# Altium PCB main.PcbDoc
Units mm, origin at the board's own origin, x right, y up, seen from the top; angles counter-clockwise.
Board outline 152.4 x 101.6 mm, 2 copper layers (Top Layer, Bottom Layer); 98 components, 61 nets, 347 pads, 75 vias.
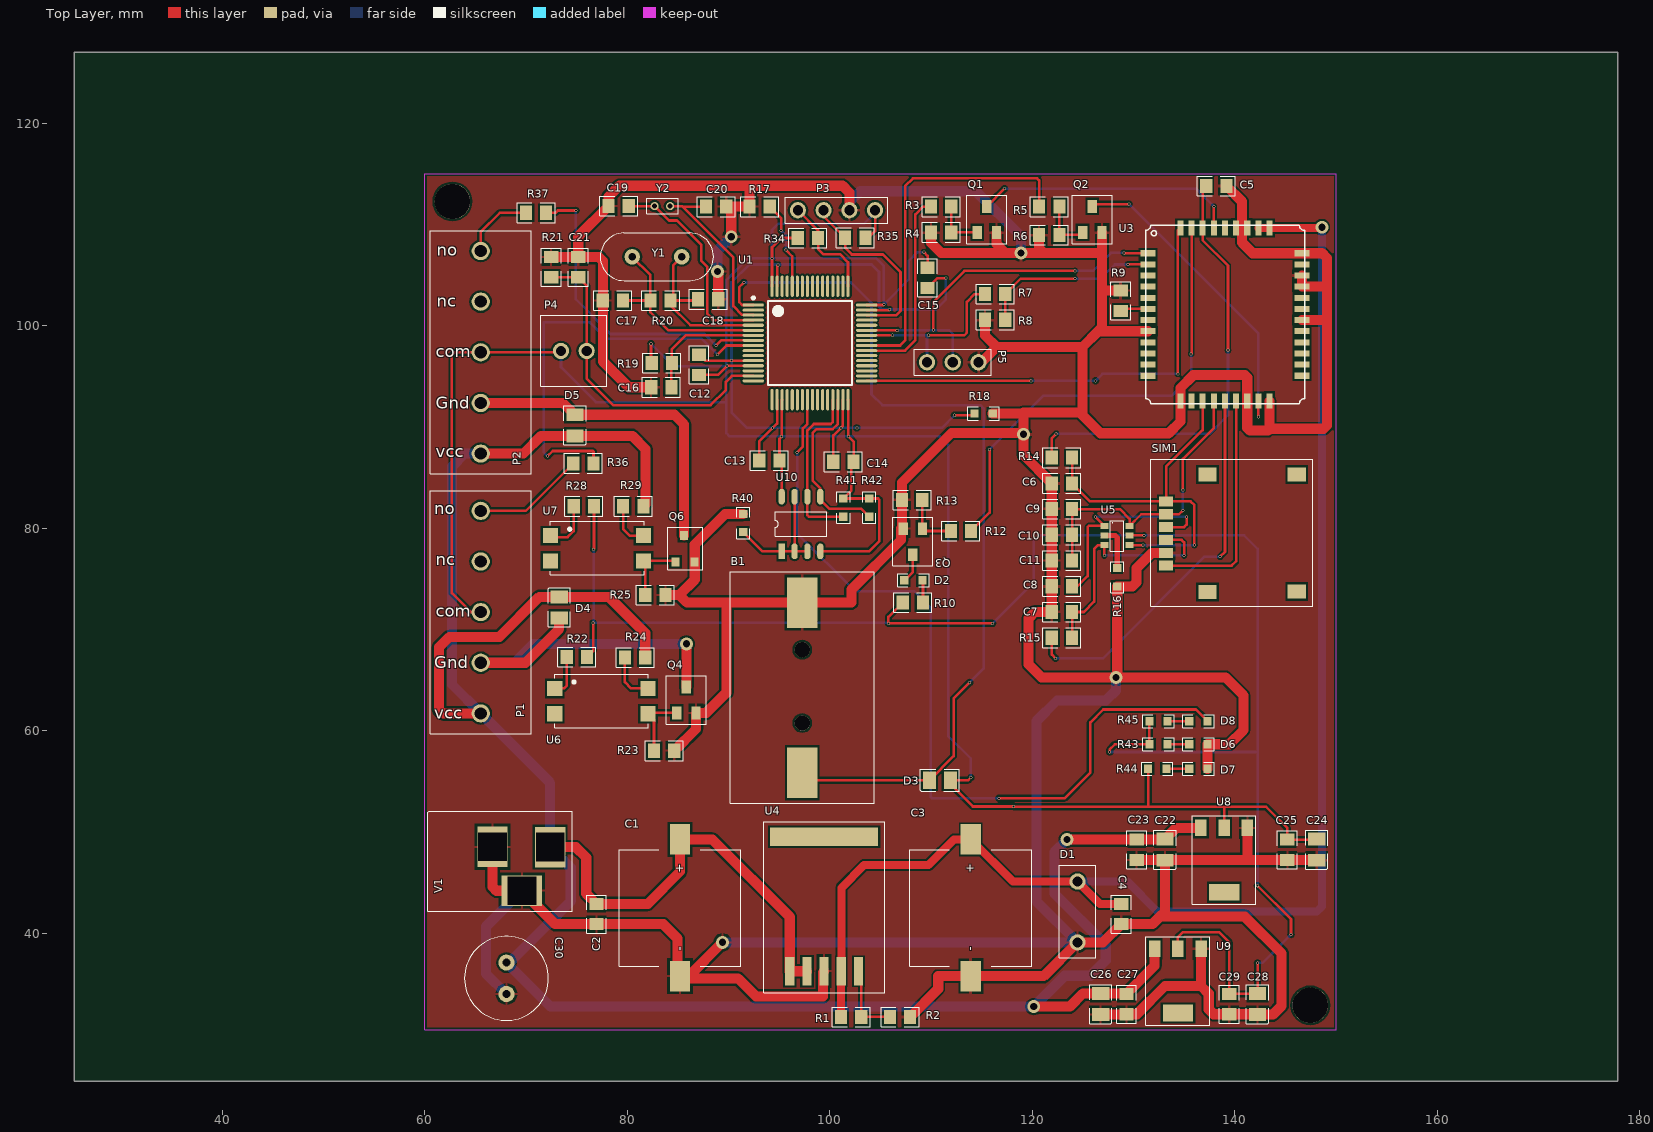
[diagram p0: Top Layer view]
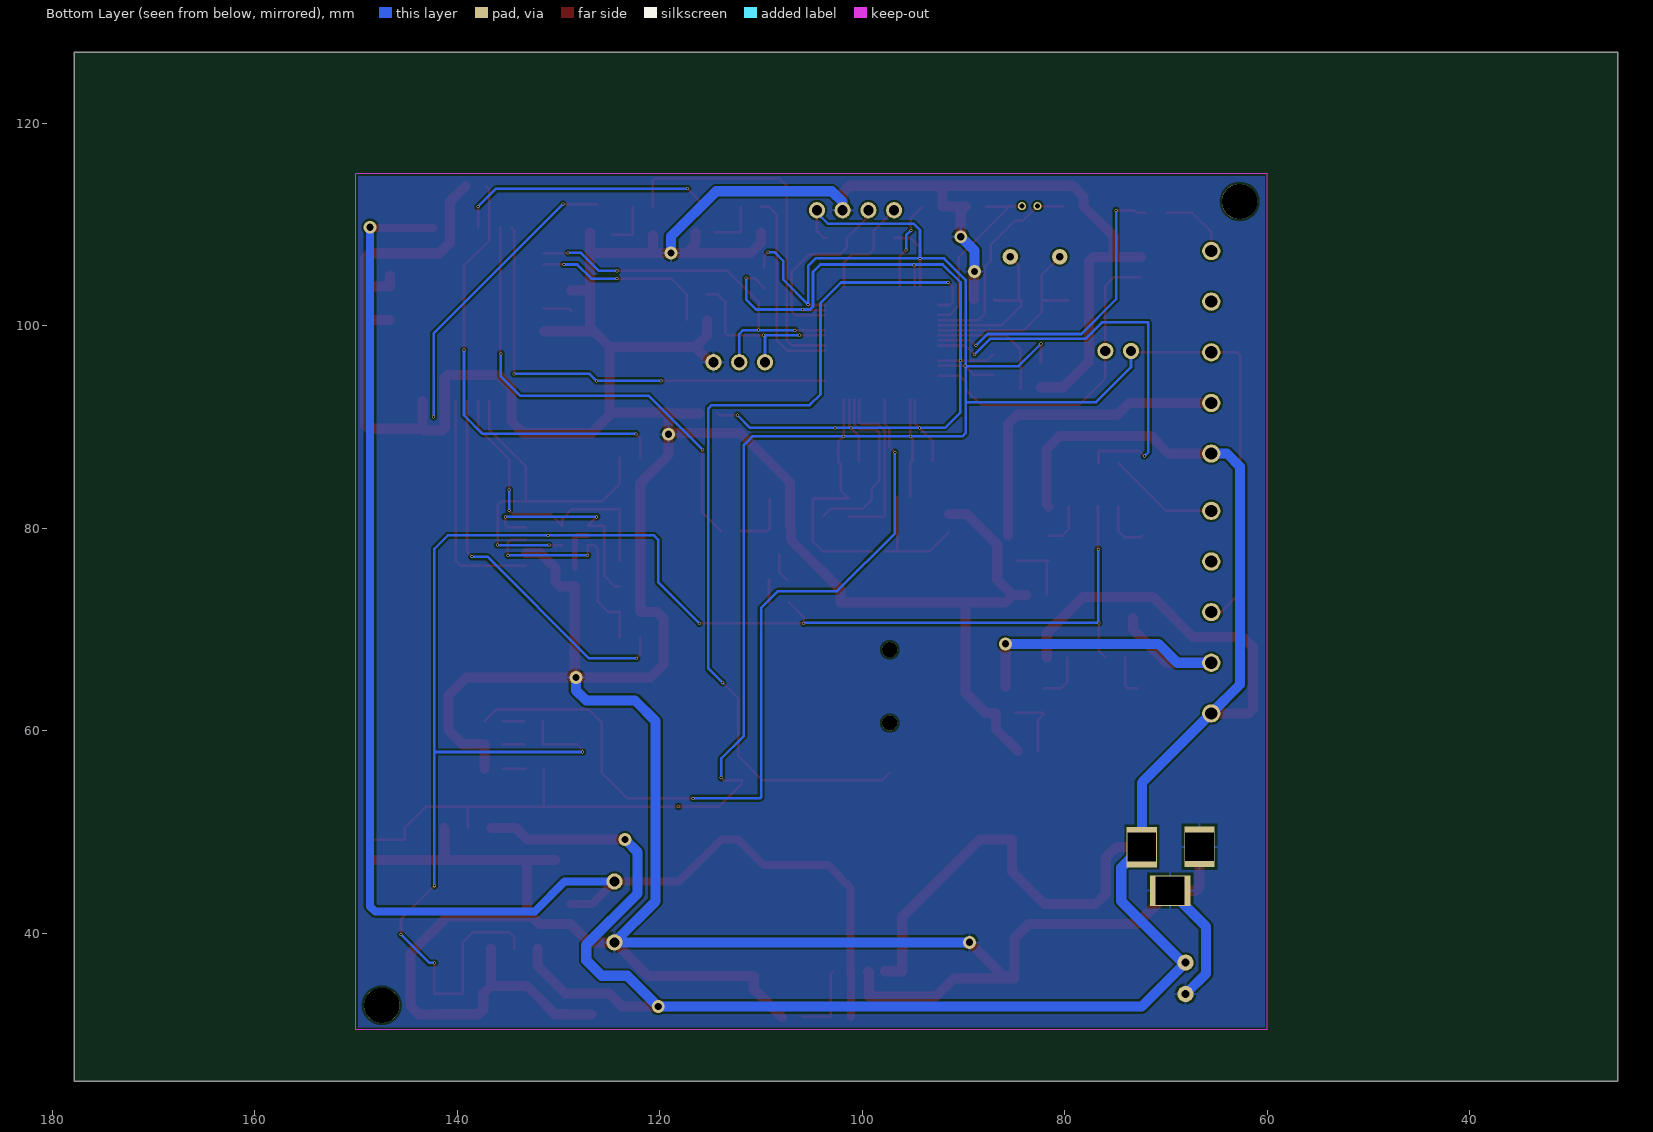
[diagram p1: Bottom Layer view, seen from below]

## Layer stack, top to bottom
Top Solder: solder mask 0.0102, Solder Resist, Dk 3.5
Top Layer: signal copper 0.0356
Dielectric 1: dielectric 0.32, FR-4, Dk 4.8
Bottom Layer: signal copper 0.0356
Bottom Solder: solder mask 0.0102, Solder Resist, Dk 3.5

## Board outline
25.4,25.4 177.8,25.4 177.8,127 25.4,127

## Design rules (kind name [scope] priority, off if disabled: settings)
Clearance [All] p1: gap=0.2
PolygonConnect [All] p1: connectstyle=Relief reliefconductorwidth=0.254 reliefentries=4 polygonreliefangle="90 Angle" airgapwidth=0.254
RoutingVias [All] p1: holewidth=0.711 width=1.27 viastyle="Through Hole" minholewidth=0.711 minwidth=1.27 maxholewidth=0.711 maxwidth=1.27
SolderMaskExpansion [All] p1: expansion=0.102
Width NetD4_1 [InNet('NetD4_1')] p1: maxlimit=1 minlimit=1 preferedwidth=1
Width NetD5_1 [InNet('NetD5_1')] p2: maxlimit=1 minlimit=1 preferedwidth=1
Width NetR16_2 [InNet('NetR16_2')] p3: maxlimit=0.5 minlimit=0.5 preferedwidth=0.5
Width VCC12 [InNet('VCC12V')] p4: maxlimit=1 minlimit=1 preferedwidth=1
Width VCC4.16 [InNet('VCC4.16')] p5: maxlimit=0.8 minlimit=0.8 preferedwidth=0.8
Width Gnd [InNet('GND')] p6: maxlimit=1 minlimit=1 preferedwidth=1
Width [All] p7: maxlimit=0.254 minlimit=0.254 preferedwidth=0.254
30 further rules are at their usual default settings.

## Components (designator, comment, footprint, x,y, rotation, side; value= is the part's Value field where it differs from the comment)
B1 "CR1220" CR1220 97.282,64.262 r90 top
C1 "470uF" 10MMX10MM+ 85.217,49.276 r270 top
C2 "100nF" 0805 76.962,41.91 r90 top
C3 "470uF" 10MMX10MM+ 113.919,49.276 r270 top
C4 "100nF" 0805 128.778,41.91 r270 top
C5 "1uF" 0805 138.176,113.792 r0 top
C6 "33pF" 0805 122.92,84.435 r0 top
C7 "33pF" 0805 122.92,71.735 r0 top
C8 "33pF" 0805 122.92,74.275 r0 top
C9 "33pF" 0805 122.92,81.895 r0 top
C10 "1uF" 0805 122.92,79.355 r0 top
C11 "100pF" 0805 122.92,76.815 r0 top
C12 "0.1uF" 0805 87.097,96.139 r90 top
C13 "0.1uF" 0805 94.031,86.69 r180 top
C14 "0.1uF" 0805 101.346,86.563 r180 top
C15 "0.1uF" 0805 109.652,104.724 r270 top
C16 "0.1uF" 0805 83.363,93.929 r180 top
C17 "20pF" 0805 78.588,102.489 r0 top
C18 "20pF" 0805 87.986,102.616 r180 top
C19 "12pF" 0805 79.146,111.811 r0 top
C20 "12pF" 0805 88.773,111.76 r180 top
C21 "0.1uF" 0805 75.159,105.791 r270 top
C22 "10uF" 1206 133.096,48.26 r270 top
C23 "0.1uF" 0805 130.302,48.26 r90 top
C24 "22uF" 1206 148.082,48.26 r270 top
C25 "0.1uF" 0805 145.174,48.26 r90 top
C26 "10uF" 1206 126.746,33.02 r270 top
C27 "0.1uF" 0805 129.286,33.02 r90 top
C28 "22uF" 1206 142.24,33.02 r270 top
C29 "0.1uF" 0805 139.446,33.02 r270 top
C30 "470uF" DIP2_8.3X3.1 68.072,35.56 r270 top
D1 "1N4733A" DIP-6MM 124.46,39.116 r90 top
D2 "Led_Green" 0603 108.255,74.854 r180 top
D3 "IN4148" 1206 110.871,55.118 r180 top
D4 "IN4148" 1206 73.279,72.187 r90 top
D5 "IN4148" 1206 74.828,90.17 r270 top
D6 "DIODE" 0603 136.398,58.674 r0 top
D7 "DIODE" 0603 136.398,56.261 r0 top
D8 "DIODE" 0603 136.398,60.96 r0 top
P1 "Ele_lock_Pin" PIN5 65.532,61.722 r90 top
P2 "Ele_lock_Pin" PIN5 65.532,87.376 r90 top
P3 "SWD" PIN4 104.47,111.404 r180 top
P4 "Pin2" XH2.54_2 73.457,97.511 r0 top
P5 "pin3" PIN3 112.141,96.393 r0 top
Q1 "S8050" SOT-23 114.554,109.22 r0 top
Q2 "S8050" SOT-23 124.968,109.22 r0 top
Q3 "S8050" SOT-23 109.144,79.959 r180 top
Q4 "SS8050" SOT-23 84.887,61.773 r0 top
Q6 "N-MOS" SOT-23-3 84.76,76.683 r0 top
R1 "120K" 0805 102.108,31.75 r180 top
R2 "56K" 0805 106.934,31.75 r0 top
R3 "4.7K" 0805 110.998,111.76 r0 top
R4 "10K" 0805 110.998,109.22 r0 top
R5 "4.7K" 0805 121.666,111.76 r0 top
R6 "10K" 0805 121.666,108.966 r0 top
R7 "1K" 0805 116.332,103.124 r0 top
R8 "5.6K" 0805 116.332,100.584 r0 top
R9 "10K" 0805 128.727,102.464 r270 top
R10 "1K" 0805 108.204,72.669 r180 top
R12 "4.7K" 0805 112.954,79.731 r180 top
R13 "10K" 0805 108.128,82.804 r0 top
R14 "4.7K" 0805 122.92,86.975 r180 top
R15 "1K" 0805 122.92,69.195 r180 top
R16 "0" 0603 128.381,75.164 r90 top
R17 "10K" 0805 93.066,111.76 r180 top
R18 "0" 0603 115.189,91.338 r180 top
R19 "10K" 0805 83.414,96.317 r0 top
R20 "1M" 0805 83.287,102.489 r0 top
R21 "10K" 0805 72.492,105.791 r270 top
R22 "1K" 0805 75.032,67.285 r0 top
R23 "10K" 0805 83.642,58.039 r180 top
R24 "330" 0805 80.772,67.234 r0 top
R25 "10K" 0805 82.779,73.406 r180 top
R28 "1K" 0805 75.717,82.169 r0 top
R29 "330" 0805 80.594,82.169 r0 top
R34 "10K" 0805 97.841,108.661 r180 top
R35 "10K" 0805 102.514,108.687 r0 top
R36 "1K" 0805 75.667,86.411 r0 top
R37 "1K" 0805 70.993,111.15 r0 top
R40 "0" 0603 91.44,80.518 r270 top
R41 "4.7K" 0603 101.346,82.042 r90 top
R42 "4.7K" 0603 103.886,82.042 r90 top
R43 "1K" 0603 132.461,58.674 r0 top
R44 "1K" 0603 132.334,56.261 r0 top
R45 "1K" 0603 132.461,60.96 r0 top
SIM1 "NANO-SIM-6P" NANO-SIM-6P 133.207,76.307 r90 top
U1 "STM32F103RCT6" STM-LQFP64_M 98.044,98.298 r0 top
U3 "AIR208" AIR208 131.175,92.309 r0 top
U4 "MIC29302WU" TO-263-5 99.441,41.402 r0 top
U5 "SRV05-4" SOT-23-6 127.111,80.244 r270 top
U6 "OPT" SOP4 72.847,64.186 r0 top
U7 "OPT" SOP4 72.415,79.273 r0 top
U8 "AMS1117-3.3V" SOT-223 138.938,47.244 r180 top
U9 "AMS1117-5V" SOT-223 134.366,35.306 r180 top
U10 "AT24C02C" SOP8 95.25,77.724 r90 top
V1 "POWER_PIN" POWER_PIN_PCB 72.39,48.514 r90 top
Y1 "8M" CRYSTAL 82.931,106.807 r90 top
Y2 "32.768K" PIN1.1 83.464,111.811 r0 top

## Footprints (in the part's own frame and the unit in brackets; to place one, negate y for a bottom-side part, rotate by r counter-clockwise, add the part's x,y. Pads: shape width x height; smd on the part's side, far side on the other; paste and mask are expansions set on the pad)
10MMX10MM+ [mm]
  rect 3x2 smd: 1(0,0) 2(13.5,0)
  silkscreen extent 1,-6 12.5,6
0603 [mm] "0603"
  rect 0.8x0.83 smd: 1(-0.9,0) 2(0.9,0)
  silkscreen extent -1.55,-0.65 1.55,0.65
0805 [mm]
  rect 1.2x1.4 smd: 1(-1,0) 2(1,0)
  silkscreen extent -1.88,-0.97 1.88,0.97
1206 [mm]
  rect 1.28x1.7 smd: 1(-1.04,0) 2(1.04,0)
  silkscreen extent -1.92,-1.1 1.92,1.1
AIR208 [mm]
  rect 1.5x0.6 smd: 1(0.25,14.85) 2(0.25,13.75) 3(0.25,12.65) 4(0.25,11.55) 5(0.25,10.45) 6(0.25,9.35) 7(0.25,8.25) 8(0.25,7.15) 9(0.25,6.05) 10(0.25,4.95) 11(0.25,3.85) 12(0.25,2.75) 22(15.45,2.75) 23(15.45,3.85) 24(15.45,4.95) 25(15.45,6.05) 26(15.45,7.15) 27(15.45,8.25) 28(15.45,9.35) 29(15.45,10.45) 30(15.45,11.55) 31(15.45,12.65) 32(15.45,13.75) 33(15.45,14.85)
  rect 0.6x1.5 smd: 13(3.446,0.25) 14(4.546,0.25) 15(5.646,0.25) 16(6.746,0.25) 17(7.846,0.25) 18(8.946,0.25) 19(10.046,0.25) 20(11.146,0.25) 21(12.246,0.25) 34(12.246,17.35) 35(11.146,17.35) 36(10.046,17.35) 37(8.946,17.35) 38(7.846,17.35) 39(6.746,17.35) 40(5.646,17.35) 41(4.546,17.35) 42(3.446,17.35)
  Top Layer pour cut-out: -0.7,15.4 1.2,15.4 1.2,2.2 -0.7,2.2 -0.7,15.4
  Top Layer pour cut-out: 2.9,1.2 12.8,1.2 12.8,-0.7 2.9,-0.7 2.9,1.2
  Top Layer pour cut-out: 14.5,12.35 16.4,12.35 16.4,2.2 14.5,2.2 14.5,12.35
  Top Layer pour cut-out: 2.9,18.3 12.8,18.3 12.8,16.4 2.9,16.4 2.9,18.3
  silkscreen extent 0,0 15.7,17.6
CR1220 [mm]
  rect 5x3 smd: 1(-8.4,0) 2(8.4,0)
  round 1.5 hole 1.5: 3(-3.5,0) 4(3.75,0)
  silkscreen extent -11.43,-7.09 11.43,7.11
CRYSTAL [mil]
  round 60 hole 30: 1(0,96.06) 2(0,-96.06)
  silkscreen extent -93,-220 93,220
DIP2_8.3X3.1 [mm]
  round 1.6 hole 0.8: 1(-1.55,0) 2(1.55,0)
  silkscreen extent -4.15,-4.15 4.15,4.15
DIP-6MM [mm]
  round 1.6 hole 1: 1(0,0) 2(6,0)
  silkscreen extent -1.5,-1.8 7.6,1.8
NANO-SIM-6P [mm]
  rect 1x1.4 smd: 1(0,0) 2(2.54,0) 3(5.08,0) 5(1.27,0) 6(3.81,0) 7(6.35,0)
  rect 1.4x1.8 smd: 8(-2.54,-12.9) 9(9,-4.1) 10(9,-12.9) 12(-2.6,-4.1)
  silkscreen extent -4,-14.5 10.5,1.5
PIN1.1 [mm]
  round 0.8 hole 0.5: 1(-0.762,0) 2(0.762,0)
  silkscreen extent -1.52,-0.74 1.55,0.76
PIN3 [mm]
  round 1.6 hole 1: 1(-2.54,0) 2(0,0) 3(2.54,0)
  silkscreen extent -3.81,-1.27 3.81,1.27
PIN4 [mm]
  round 1.6 hole 1: 1(0,0) 2(2.54,0) 3(5.08,0) 4(7.62,0)
  silkscreen extent -1.27,-1.27 8.89,1.27
PIN5 [mm]
  round 1.8 hole 1.2: 1(0,0) 2(5,0) 3(10,0) 4(15,0) 5(20,0)
  silkscreen extent -2,-5 22,5
POWER_PIN_PCB [mm]
  rect 4x3 hole 2.8 square: 1(0,0) 3(0.033,5.7)
  rect 3x4 hole 2.8 square: 2(-4.3,2.8)
  silkscreen extent -6.35,-2.16 3.56,12.06
SOP4 [mm]
  rect 1.5x1.5 smd: 1(0,0) 2(0,-2.5) 3(9.2,-2.5) 4(9.2,0)
  silkscreen extent 0,-3.86 9.25,1.4
SOP8 [mil]
  rect 61x24 smd: 1(0,0)
  oval 61x24 smd: 2(0,-50) 3(0,-100) 4(0,-150) 5(212.6,-150) 6(212.6,-100) 7(212.6,-50) 8(212.6,0)
  silkscreen extent 60,-175 153,25
SOT-23 [mm]
  rect 0.915x1.27 smd: 1(0,0) 2(1.9,0) 3(0.95,2.57)
  silkscreen extent -1.02,-1.14 2.92,3.68
SOT-23-3 [mm]
  rect 0.8x0.9 smd: 1(0,0) 2(1.9,0) 3(0.85,2.6)
  silkscreen extent -0.76,-0.76 2.69,3.43
SOT-23-6 [mm]
  rect 0.6x0.8 smd: 1(0,0) 2(0.95,0) 3(1.9,0) 4(1.9,2.5) 5(0.95,2.5) 6(0,2.5)
  silkscreen extent -0.5,0.6 2.5,1.9
SOT-223 [mm]
  rect 1.14x1.65 smd: 1(-2.3,-3.175) 2(0,-3.175) 3(2.3,-3.175)
  rect 3x1.65 smd: 4(-0.014,3.175)
  silkscreen extent -3.14,-4.35 3.16,4.38
STM-LQFP64_M [mm] "Thin QFP, 64-Leads, Body 10x10mm, Pitch 0.5mm, IPC Low Density"
  oval 2.1x0.3 smd: 1(-5.6,3.75) 2(-5.6,3.25) 3(-5.6,2.75) 4(-5.6,2.25) 5(-5.6,1.75) 6(-5.6,1.25) 7(-5.6,0.75) 8(-5.6,0.25) 9(-5.6,-0.25) 10(-5.6,-0.75) 11(-5.6,-1.25) 12(-5.6,-1.75) 13(-5.6,-2.25) 14(-5.6,-2.75) 15(-5.6,-3.25) 16(-5.6,-3.75) 33(5.6,-3.75) 34(5.6,-3.25) 35(5.6,-2.75) 36(5.6,-2.25) 37(5.6,-1.75) 38(5.6,-1.25) 39(5.6,-0.75) 40(5.6,-0.25) 41(5.6,0.25) 42(5.6,0.75) 43(5.6,1.25) 44(5.6,1.75) 45(5.6,2.25) 46(5.6,2.75) 47(5.6,3.25) 48(5.6,3.75)
  oval 0.3x2.1 smd: 17(-3.75,-5.6) 18(-3.25,-5.6) 19(-2.75,-5.6) 20(-2.25,-5.6) 21(-1.75,-5.6) 22(-1.25,-5.6) 23(-0.75,-5.6) 24(-0.25,-5.6) 25(0.25,-5.6) 26(0.75,-5.6) 27(1.25,-5.6) 28(1.75,-5.6) 29(2.25,-5.6) 30(2.75,-5.6) 31(3.25,-5.6) 32(3.75,-5.6) 49(3.75,5.6) 50(3.25,5.6) 51(2.75,5.6) 52(2.25,5.6) 53(1.75,5.6) 54(1.25,5.6) 55(0.75,5.6) 56(0.25,5.6) 57(-0.25,5.6) 58(-0.75,5.6) 59(-1.25,5.6) 60(-1.75,5.6) 61(-2.25,5.6) 62(-2.75,5.6) 63(-3.25,5.6) 64(-3.75,5.6)
  silkscreen extent -5.72,-4.15 4.15,4.57, body extent -5,-5 5,5, height 1.6
TO-263-5 [mm]
  rect 0.91x2.8 smd: 1(-3.4,-5.138) 2(-1.7,-5.138) 3(0,-5.138) 4(1.7,-5.138) 5(3.4,-5.138)
  rect 10.668x1.8 smd: 6(0,8.138)
  silkscreen extent -5.94,-7.26 5.99,9.6
XH2.54_2 [mm]
  round 1.6 hole 1: 1(0,0) 2(2.54,0)
  silkscreen extent -2,-3.5 4.5,3.5

## Part data
B1: library part BAT
C1 C3 C22 C24 C26 C28 C30: library part Cap_Elec
C2 C4 C5 C6 C7 C8 C9 C10 C11 C12 C13 C14 C15 C16 C17 C18 C19 C20 C21 C23 C25 C27 C29: library part Cap
D1 D2 D3 D4 D5: library part DIODE
Q1 Q2 Q3 Q4: library part Npn-Sot-23
R1 R2 R3 R4 R5 R6 R7 R8 R9 R10 R12 R13 R14 R15 R16 R17 R18 R19 R20 R21 R22 R23 R24 R25 R28 R29 R34 R35 R36 R37 R40 R41 R42 R43 R44 R45: library part Res
U1: "ARM Cortex-M3 32-bit MCU, 256 KB Flash, 48 KB Internal RAM, 51 I/Os, 64-pin LQFP, -40 to 85 degC, Tray"
U9: library part AMS1117-3.3V
Y1 Y2: library part crystal

## Free pads (board coordinates)
  round 3.5 hole 3.5: 6(62.738,112.268) 7(147.447,32.893)

## Via types
v1: diameter 0.3, hole 0.2, Top Layer to Bottom Layer, 65 vias
v2: diameter 1.27, hole 0.711, Top Layer to Bottom Layer, 10 vias

## Nets (pads, with @x,y where several pads share a name; then routed paths per layer and width w, separated by ;. In a path a pad name is that pad's centre, name@x,y a point inside that pad or via, vN(x,y) a via of type N, cw(c..) or ccw(c..) an arc to the next point about the centre after c; other vN are vias at no path point)
ADC1: C21.2 P4.2 R21.2 U1.15 | length 32.2
  Top Layer w0.254: R21.2 C21.2 75.997,103.953 P4.2 75.997,94.767 78.613,92.151 88.24,92.151 89.738,93.65 89.738,94.463 90.324,95.048 U1.15
EEP_SCL: R41.1 U1.29 U10.6 | length 17
  Top Layer w0.254: U1.29 100.294,90.515 100.076,90.297 98.425,90.297 97.79,89.662 U10.6 97.79,81.28 97.928,81.142 R41.1
EEP_SDA: R42.1 U1.30 U10.5 | length 17.7
  Top Layer w0.254: U1.30 100.794,90.293 100.29,89.789 98.679,89.789 98.298,89.408 98.298,84.709 99.06,83.947 U10.5 99.06,82.804 99.949,81.915 103.113,81.915 R42.1
GND: B1.2 C1.2 C2.1 C3.2 C4.2 C5.2 C6.1 C7.1 C8.1 C9.1 C10.1 C11.1 C16.2 C17.1 C18.1 C19.1 C20.1 C21.1 C22.2 C23.1 C24.2 C25.1 C26.2 C27.1 C28.2 C29.2 C30.2 D1.1 D6.2 D7.2 P3.2 P5.3 Q1.2 Q2.2 Q3.2 Q4.2 Q6.2 R2.2 R4.1 R6.1 R8.1 R9.1 R13.1 R16.1 R17.2 R18.1 R21.1 R23.1 R25.1 R40.1 SIM1.5 U3.8 U3.13 U3.19 U3.21 U3.27 U3.30 U3.31 U3.33 U3.36 U3.37 U4.3 U8.1 U9.1 V1.2 V1.3 | length 621.8
  Top Layer w1: V1.3 66.69,44.598 67.074,44.214 V1.2 72.894,40.91 C2.1 83.55,40.91 84.979,39.481 84.979,35.538 90.954,35.538 92.71,33.782 99.314,33.782 99.314,36.137 U4.3 ; R21.1 C21.1 ; C16.2 80.137,93.929 77.588,96.479 C17.1 77.588,106.385 77.181,106.791 C21.1 ; R25.1 85.141,73.406 ; R23.1 86.787,60.184 Q4.2 87.808,61.773 89.789,63.754 89.789,72.535 89.662,72.662 ; C1.2 86.068,35.776 v2(89.408,39.116) ; v2(88.9,105.359) 88.986,105.274 C18.1 ; v2(90.272,108.788) 90.272,111.261 C20.1 R17.2 92.066,113.275 92.608,113.817 ; R40.1 89.673,81.418 86.66,78.405 Q6.2 86.66,74.925 85.141,73.406 ; P3.2 101.93,113.157 101.27,113.817 92.608,113.817 ; R2.2 110.706,34.522 110.706,35.776 C3.2 121.12,35.776 D1.1 126.984,39.116 C4.2 131.842,40.91 132.588,41.656 ; R4.1 109.998,108.188 110.998,107.188 117.348,107.188 ; P5.3 114.975,96.393 116.479,97.897 ; R8.1 115.332,99.044 116.479,97.897 ; R18.1 119.024,91.338 119.126,91.44 ; Q1.2 116.454,108.082 117.348,107.188 ; R6.1 120.666,107.68 121.158,107.188 ; C26.2 129.246,31.98 C27.1 130.318,32.02 133.096,34.798 136.652,34.798 ; Q2.2 126.868,107.188 ; v2@128.016,65.278 120.904,65.278 119.634,66.548 119.634,71.12 120.249,71.735 C7.1 C8.1 C11.1 C10.1 C9.1 C6.1 119.126,87.229 v2(119.126,89.281) v2@119.126,89.408 ; v2(128.27,65.278) 139.065,65.278 140.843,63.5 140.843,60.071 139.446,58.674 D6.2 D7.2 ; v2@128.381,65.643 R16.1 129.894,74.264 130.286,74.656 130.286,76.053 131.81,77.577 SIM1.5 ; R9.1 126.935,103.464 126.868,103.53 ; C23.1 140.986,47.26 ; U3.8 126.514,99.459 ; C22.2 133.096,42.164 132.588,41.656 ; U9.1 136.652,38.467 136.652,34.798 ; C5.2 140.716,112.252 140.716,108.204 141.761,107.159 U3.33 148.619,107.159 149.098,106.68 149.098,104.14 ; U8.1 141.238,47.512 140.986,47.26 ; U3.21 143.421,89.823 ; U3.27 149.073,100.559 ; U3.31 U3.30 148.817,103.859 149.098,104.14 ; C24.2@148.042,47.26 C25.1 140.986,47.26 ; C21.1 75.159,108.823 C19.1 78.146,112.741 79.223,113.817 92.608,113.817 ; 85.141,73.406 85.885,72.662 89.662,72.662 ; 89.662,72.662 B1.2 102.126,72.662 102.126,73.932 107.03,78.836 107.03,79.977 107.128,80.075 R13.1 107.128,84.522 112.014,89.408 v2@119.126,89.408 ; 116.479,97.897 124.952,97.897 ; 117.348,107.188 v2(118.872,107.188) 121.158,107.188 ; v2@119.126,89.408 119.126,91.44 ; 119.126,91.44 124.678,91.44 124.952,91.166 ; 121.158,107.188 126.868,107.188 ; 124.952,91.166 126.73,89.388 133.461,89.388 134.621,90.548 U3.13 134.621,93.854 135.89,95.123 140.97,95.123 141.221,94.872 U3.19 141.221,89.909 141.488,89.642 143.24,89.642 143.421,89.823 ; 124.952,91.166 124.952,97.897 ; 124.952,97.897 126.514,99.459 ; 126.514,99.459 126.868,99.813 126.868,103.53 ; 126.868,103.53 126.868,107.188 ; 132.588,41.656 140.97,41.656 144.616,38.01 144.616,32.856 143.74,31.98 C28.2 142.2,32.02 C29.2 137.906,32.02 137.414,32.512 137.414,34.036 136.652,34.798 ; 143.421,89.823 148.751,89.823 149.098,90.17 149.098,104.14
  Bottom Layer w1: C30.2 66.04,36.042 66.04,40.664 V1.2 ; v2(88.9,105.359) 88.9,107.417 v2(90.272,108.788) ; v2(89.408,39.116) D1.1 120.396,43.18 120.396,60.96 122.428,62.992 127.254,62.992 128.27,64.008 v2(128.27,65.278) ; P3.2 101.93,112.217 102.997,113.284 114.427,113.284 118.872,108.839 v2(118.872,107.188)
GSM_BOOT_STATU: U1.33 U3.42 | length 45.5
  Top Layer w0.254: U1.33 119.846,94.548 v1(119.863,94.564) ; v1(134.366,95.25) 134.366,109.404 U3.42
  Bottom Layer w0.254: v1(119.863,94.564) v1(126.238,94.564) 126.924,95.25 v1(134.366,95.25)
GSM_REST: Q2.3 U3.20 | length 31.2
  Top Layer w0.254: Q2.3@126.142,112.014 v1(129.54,112.014) ; v1(142.321,91.013) U3.20
  Bottom Layer w0.254: v1(129.54,112.014) 142.321,99.233 v1(142.321,91.013)
GSM_RST: R15.2 U3.17 | length 38.2
  Top Layer w0.254: R15.2 121.92,67.528 v1(122.285,67.163) ; v1(138.541,77.196) 139.021,77.676 U3.17
  Bottom Layer w0.254: v1(122.285,67.163) 126.984,67.163 137.017,77.196 v1(138.541,77.196)
GSM_RXD: R7.2 R8.2 U3.2 | length 17.9
  Top Layer w0.254: R8.2 R7.2 118.856,104.648 v1(124.206,104.648) ; v1@129.427,106.059 U3.2
  Bottom Layer w0.254: v1(124.206,104.648) 126.746,104.648 128.143,106.045 v1(129.464,106.045)
I/O_LOCK1: R36.2 U1.9 | length 41.6
  Top Layer w0.254: v1(72.136,87.122) 72.644,87.63 76.581,87.63 76.667,87.544 R36.2 ; v1(88.9,97.155) 89.793,98.048 U1.9
  Bottom Layer w0.254: v1(72.136,87.122) 71.755,87.503 71.755,100.33 76.327,100.33 77.924,98.733 87.322,98.733 v1(88.9,97.155)
I/O_LOCK2: R37.2 U1.8 | length 31.4
  Top Layer w0.254: R37.2 72.923,111.15 73.152,111.379 v1(74.93,111.379) ; v1(88.773,98.044) 89.277,98.548 U1.8
  Bottom Layer w0.254: v1(74.93,111.379) 74.93,102.616 78.359,99.187 87.63,99.187 v1(88.773,98.044)
MCU_I/O1: U6.2
MCU_I/O2: U7.2
MCU_IO_PWR: R3.1 U1.39 | length 19.5
  Top Layer w0.254: U1.39 107.43,97.548 108.458,98.576 108.458,110.998 109.22,111.76 R3.1
MCU_IO_REST: R5.1 U1.40 | length 35.5
  Top Layer w0.254: U1.40 106.938,98.048 107.442,98.552 107.442,113.792 108.204,114.554 120.465,114.554 120.666,114.353 R5.1
MCU_REST: C16.1 R19.2 U1.7 | length 12.5
  Top Layer w0.254: C16.1@84.363,93.777 84.363,96.266 R19.2 84.414,97.698 85.764,99.048 U1.7
MCU_RXD: P5.2 U1.43 U3.1 | length 37.4
  Top Layer w0.254: U1.43 v1(106.66,99.548) v1@106.68,99.568 ; v1(110.236,99.568) 110.236,102.362 113.284,105.41 v1(124.206,105.41) ; v1@129.061,107.159 U3.1
  Bottom Layer w0.254: v1(106.66,99.548) 110.216,99.548 v1(110.236,99.568) 111.76,99.568 112.141,99.187 P5.2 ; v1(124.206,105.41) 125.984,105.41 127.762,107.188 v1(129.032,107.188)
MCU_TXD: P5.1 R7.1 U1.42 | length 17.5
  Top Layer w0.254: U1.42 105.906,99.048 105.918,99.06 ; v1(109.728,99.06) 113.284,99.06 113.538,99.314 113.538,102.362 114.3,103.124 R7.1
  Bottom Layer w0.254: v1(106.172,99.06) 106.172,99.056 106.18,99.048 109.716,99.048 v1(109.728,99.06) ; P5.1 109.601,98.933
NET-LED: R12.1 U3.41 | length 46.4
  Top Layer w0.254: R12.1 115.773,81.55 v1(115.773,87.782) ; v1(135.687,97.231) 135.721,97.266 U3.41
  Bottom Layer w0.254: v1(115.773,87.782) 121.056,93.066 133.756,93.066 135.687,94.996 v1(135.687,97.231)
NetB1_1: B1.1 D3.2 U1.1 | length 89.6
  Top Layer w0.254: v1(91.516,104.267) 91.059,103.81 91.059,102.337 91.348,102.048 U1.1 ; B1.1 98.026,55.118 D3.2 112.225,57.512 112.225,63.177 v1(113.817,64.77)
  Bottom Layer w0.254: v1(91.516,104.267) 102.083,104.267 104.115,102.235 104.115,93.218 105.181,92.151 114.884,92.151 115.189,91.846 115.189,66.142 v1(113.817,64.77) v1@113.741,64.694
NetC12_2: C12.2 C13.2 C14.2 C15.2 R18.2 U1.12 U1.18 U1.31 U1.47 U1.63 | length 91.7
  Top Layer w0.254: C12.2 87.69,96.545 v1(90.297,96.545) ; v1@90.269,96.548 U1.12 ; C13.2 93.031,88.586 v1(94.336,89.891) 94.794,90.349 U1.18 ; U1.63 v1@94.794,105.919 ; C14.2 100.346,89.17 v1(101.092,89.916) 101.271,90.095 101.271,92.675 U1.31 ; U1.47 105.866,101.548 v1(105.918,101.6) ; C15.2 110.626,104.699 v1(111.455,104.699) ; v1(112.319,91.161) 114.111,91.161 R18.2
  Bottom Layer w0.254: v1(111.455,104.699) 111.455,102.591 110.465,101.6 v1(105.918,101.6) 105.912,101.606 105.136,101.606 104.857,101.885 104.857,105.328 104.14,106.045 92.05,106.045 90.297,104.292 v1(90.297,96.545) 90.317,96.526 90.317,91.42 91.821,89.916 v1(101.092,89.916) v1(102.667,89.916) 111.074,89.916 v1(112.319,91.161)
  other v1: 94.894,106.02
NetD2_1: D2.1 R10.1 | length 2.2
  Top Layer w0.254: D2.1 109.204,74.805 R10.1
NetD2_2: D2.2 Q3.3 | length 2.9
  Top Layer w0.254: D2.2 108.194,75.693 Q3.3
NetD4_1: D4.1 P1.2 Q4.3 | length 35.6
  Top Layer w1: P1.2 69.948,66.722 73.279,70.053 D4.1 ; Q4.3 85.837,68.59 v2(85.842,68.59)
  Bottom Layer w1: P1.2 68.881,66.722 70.749,68.59 v2(85.842,68.59)
NetD5_1: D5.1 P2.2 Q6.3 | length 31.9
  Top Layer w1: P2.2 73.662,92.376 D5.1 84.66,91.21 85.61,90.26 Q6.3
NetD6_1: D6.1 R43.2 | length 2.1
  Top Layer w0.254: R43.2 D6.1
NetD7_1: D7.1 R44.2 | length 2.3
  Top Layer w0.254: R44.2 D7.1
NetD8_1: D8.1 R45.2 | length 2.1
  Top Layer w0.254: R45.2 D8.1
NetP1_5: P1.5 R36.1 | length 11.1
  Top Layer w0.254: P1.5 69.978,81.722 R36.1
NetP2_5: P2.5 R37.1 | length 7.1
  Top Layer w0.254: P2.5 65.532,109.271 67.412,111.15 R37.1
NetQ1_1: Q1.1 R3.2 R4.2 | length 5.1
  Top Layer w0.254: R3.2 R4.2 Q1.1
NetQ2_1: Q2.1 R5.2 R6.2 | length 4.8
  Top Layer w0.254: R5.2 R6.2 Q2.1@124.714,108.966
NetQ3_1: Q3.1 R12.2 R13.2 | length 5.8
  Top Layer w0.254: R13.2 109.128,79.975 Q3.1 109.372,79.731 R12.2
NetQ4_1: Q4.1 R23.2 U6.3 | length 6.8
  Top Layer w0.254: R23.2 82.642,61.091 U6.3 82.134,61.773 Q4.1
NetQ6_1: Q6.1 R25.2 U7.3 | length 6.5
  Top Layer w0.254: R25.2 81.779,76.61 U7.3 Q6.1@84.669,76.773
NetR1_1: R1.1 R2.1 U4.5 | length 7.5
  Top Layer w0.254: U4.5 103.108,35.997 R1.1 R2.1
NetR9_2: R9.2 U3.6 | length 2.8
  Top Layer w0.254: R9.2 128.923,101.659 U3.6
NetR16_2: R16.2 U5.2 | length 4.4
  Top Layer w0.5: U5.2 128.188,79.294 128.381,79.101 R16.2
NetR17_1: R17.1 U1.60 | length 8.8
  Top Layer w0.254: R17.1 95.199,110.626 v1(95.199,109.398) ; v1(95.656,107.493) 96.294,106.855 U1.60
  Bottom Layer w0.254: v1(95.199,109.398) 95.656,108.941 v1(95.656,107.493)
NetR22_1: R22.1 U6.1 | length 4.1
  Top Layer w0.254: U6.1 73.736,64.186 74.032,64.481 R22.1
NetR24_1: R24.1 U6.4 | length 5
  Top Layer w0.254: R24.1 79.772,64.805 80.391,64.186 U6.4
NetR28_1: R28.1 U7.1 | length 5.1
  Top Layer w0.254: U7.1 72.568,79.121 74.117,79.121 74.717,79.721 R28.1
NetR29_1: R29.1 U7.4 | length 4.6
  Top Layer w0.254: R29.1 79.594,79.924 80.271,79.248 81.59,79.248 U7.4
NetR40_2: R40.2 U10.1 U10.2 U10.3 U10.7 | length 12.5
  Top Layer w0.254: R40.2 93.334,77.724 U10.1 U10.2 ; U10.7 U10.2 ; U10.3 U10.2
OSC_IN1: C20.2 U1.3 Y2.2 | length 17.8
  Top Layer w0.254: Y2.2 85.42,111.811 85.471,111.76 ; C20.2 85.471,111.76 ; U1.3 92.421,101.071 91.346,101.071 90.475,101.943 90.475,106.756 85.471,111.76
OSC_IN2: C18.2 R20.2 U1.5 Y1.2 | length 17
  Top Layer w0.254: Y1.2 84.531,105.967 84.531,102.734 R20.2 ; C18.2 86.859,102.489 R20.2 ; U1.5 86.236,100.048 84.287,101.997 R20.2
OSC_OUT1: C19.2 U1.4 Y2.1 | length 20.6
  Top Layer w0.254: C19.2 Y2.1 84.125,110.388 84.912,110.388 87.3,108.001 87.3,106.426 87.913,105.813 87.913,101.169 88.468,100.614 88.468,100.548 U1.4
OSC_OUT2: C17.2 R20.1 U1.6 Y1.1 | length 19.8
  Top Layer w0.254: C17.2 R20.1 ; Y1.1 82.287,105.011 R20.1 ; U1.6 84.069,99.548 82.287,101.33 R20.1
PWRKEY: Q1.3 U3.39 | length 26
  Top Layer w0.254: Q1.3 v1(117.252,113.538) ; U3.39 v1(137.922,111.76)
  Bottom Layer w0.254: v1(117.252,113.538) 136.144,113.538 v1(137.922,111.76)
SIM_CLK: C9.2 C10.2 C11.2 SIM1.3 U3.16 U5.6 | length 29.8
  Top Layer w0.254: C11.2 C10.2 C9.2 128.635,81.895 129.611,80.919 U5.6 130.754,81.387 SIM1.3 134.477,81.387 v1(134.858,81.768) ; v1(134.858,83.8) 134.858,86.848 137.921,89.911 U3.16
  Bottom Layer w0.254: v1(134.858,81.768) v1(134.858,83.8)
SIM_I/O: C6.2 R14.1 SIM1.7 U3.15 U5.4 | length 37.2
  Top Layer w0.254: R14.1 C6.2 125.698,82.657 SIM1.7 ; U5.4 130.916,78.344 v1(130.921,78.339) ; v1(136.001,78.339) 136.001,82.276 135.62,82.657 SIM1.7 ; U3.15 136.821,89.7 133.207,86.086 SIM1.7
  Bottom Layer w0.254: v1(130.921,78.339) v1(136.001,78.339)
SIM_RST: C7.2 R15.1 SIM1.2 U5.3 | length 23.6
  Top Layer w0.254: R15.1 C7.2 125.079,71.735 126.095,72.751 126.095,77.958 126.481,78.344 U5.3 v1(127.111,77.323) ; SIM1.2 134.731,78.847 134.985,78.593 v1(134.985,77.323)
  Bottom Layer w0.254: v1(127.111,77.323) v1(134.985,77.323)
SIM_VDD: SIM1.1 U3.18 | length 22.9
  Top Layer w0.254: SIM1.1 139.684,76.307 140.121,76.744 U3.18
SIM_VPP: C8.2 SIM1.6 U5.1 | length 21.7
  Top Layer w0.254: C8.2 124.444,74.275 125.46,75.291 125.46,80.117 125.587,80.244 U5.1 v1(126.222,81.133) ; SIM1.6 134.985,80.117 135.239,80.371 v1(135.239,81.133)
  Bottom Layer w0.254: v1(126.222,81.133) v1(135.239,81.133)
SW_CLK: P3.4 R34.1 U1.49 | length 10.5
  Top Layer w0.254: P3.4 98.841,109.414 R34.1 98.841,107.56 99.339,107.061 100.99,107.061 101.794,106.257 U1.49
SW_DIO: P3.3 R35.1 U1.46 | length 18.4
  Top Layer w0.254: P3.3 99.39,110.811 R35.1 101.514,107.705 102.184,107.036 105.232,107.036 106.985,105.283 106.985,101.454 106.578,101.048 U1.46
TEST: D8.2 U1.24 | length 82.9
  Top Layer w0.254: v1(96.774,87.503) 97.336,88.065 97.336,89.85 97.794,90.308 U1.24 ; v1(116.713,53.34) 123.19,53.34 125.73,55.88 125.73,60.833 127,62.103 136.155,62.103 D8.2
  Bottom Layer w0.254: v1(96.774,87.503) 96.774,79.502 102.489,73.787 108.331,73.787 109.982,72.136 109.982,53.467 110.109,53.34 v1(116.713,53.34)
VCC3.3: C12.1 C13.1 C14.1 C15.1 C24.1 C25.2 D3.1 P1.3 P2.3 P3.1 P4.1 R19.1 R34.2 R35.2 R41.2 R42.2 R44.1 U1.13 U1.19 U1.32 U1.48 U1.64 U8.2 U10.4 U10.8 | length 281.5
  Top Layer w0.254: P1.3 64.574,71.722 62.687,73.609 62.687,97.104 62.959,97.376 P2.3 73.322,97.376 P4.1 ; v1(82.347,98.222) 82.347,96.384 R19.1 ; C12.1 88.967,95.139 v1(89.84,96.012) 89.876,96.048 U1.13 ; U1.64 v1(94.294,106.638) 94.294,107.731 95.225,108.661 R34.2 ; U10.8 95.25,86.471 C13.1 95.031,88.833 v1(95.25,89.052) 95.271,89.073 95.271,92.675 U1.19 ; U10.4 103.886,77.724 104.902,78.74 104.902,82.804 104.764,82.942 R42.2 R41.2 102.108,83.704 102.108,86.325 C14.1 102.346,88.56 v1(101.829,89.078) 101.829,92.663 U1.32 ; R35.2 103.81,108.687 104.47,109.347 P3.1 ; U1.48 105.299,102.048 v1(105.334,102.083) ; v1(109.296,107.264) 109.652,106.909 C15.1 ; v1(113.919,55.372) 113.665,55.118 D3.1 111.911,54.737 114.121,52.527 v1(118.135,52.527) 118.161,52.502 131.445,52.502 ; R44.1 131.434,52.513 131.445,52.502 ; U8.2 138.938,52.502 ; C24.1@148.042,49.26 C25.2 145.174,50.406 143.078,52.502 138.938,52.502 ; 131.445,52.502 138.938,52.502
  Bottom Layer w0.254: P4.1 73.457,95.91 76.911,92.456 89.764,92.456 89.789,92.481 ; v1(82.347,98.222) 84.557,96.012 v1@89.789,96.012 ; v1(89.84,96.012) v1@89.789,96.012 ; v1(94.294,106.638) v1@94.294,106.655 ; P3.1 104.47,111.15 103.403,110.084 94.945,110.084 94.294,109.432 v1@94.294,106.655 ; v1(109.296,107.264) 108.661,107.264 107.798,106.401 107.798,104.546 v1(105.334,102.083) 105.334,105.918 104.597,106.655 v1@94.294,106.655 ; v1(113.919,55.372) 113.919,57.277 111.684,59.512 111.684,88.24 110.846,89.078 v1(101.829,89.078) 90.119,89.078 89.789,89.408 89.789,92.481 ; 89.789,92.481 v1@89.789,96.012 ; v1@89.789,96.012 89.789,104.521 91.923,106.655 v1@94.294,106.655
VCC4.16: C3.1 C4.1 D1.2 R1.2 U3.34 U3.35 U4.4 | length 143.9
  Top Layer w0.8: R1.2 101.108,36.231 U4.4 101.141,44.499 103.378,46.736 109.728,46.736 112.268,49.276 C3.1 118.079,45.116 D1.2 126.666,42.91 C4.1 ; U3.35 U3.34 148.521,109.659 v2(148.59,109.728)
  Bottom Layer w0.8: D1.2 129.382,45.116 132.334,42.164 148.082,42.164 148.59,42.672 v2(148.59,109.728)
VCC5: C28.1 C29.1 R10.2 R22.2 R28.2 R43.1 R45.1 U5.5 U9.2 | length 174.4
  Top Layer w0.254: R22.2 76.632,67.885 v1(76.632,70.663) ; v1(76.683,77.927) 76.717,77.962 R28.2 ; R10.2 105.791,71.256 v1(105.791,70.612) v1(116.078,70.612) ; v1(127.635,57.912) 127.635,58.166 128.143,58.674 R43.1 R45.1 ; U5.5 v1(131.018,79.294) ; U9.2 134.366,39.624 134.874,40.132 138.43,40.132 139.446,39.116 C29.1 142.2,34.02 C28.1 v1(142.24,37.084) ; v1(142.24,44.704) 145.542,41.402 v1(145.542,39.878)
  Bottom Layer w0.254: v1(76.683,77.927) 76.683,70.714 v1(76.632,70.663) 105.74,70.663 v1(105.791,70.612) ; v1(116.078,70.612) 120.142,74.676 120.142,78.867 120.569,79.294 v1(131.018,79.294) 140.924,79.294 142.24,77.978 142.24,57.912 ; v1(127.635,57.912) 142.24,57.912 ; v1(142.24,37.084) 142.748,37.084 v1(145.542,39.878) ; v1(142.24,44.704) 142.24,57.912
VCC12V: C1.1 C2.2 C22.1 C23.2 C26.1 C27.2 C30.1 D4.2 D5.2 P1.1 P2.1 R24.2 R29.2 U4.1 U4.2 U8.3 U9.3 V1.1 | length 269.2
  Top Layer w1: P1.1 61.798,61.722 61.417,62.103 61.417,68.25 62.433,69.266 67.361,69.266 71.322,73.227 D4.2 78.183,73.227 81.772,69.637 R24.2 ; P2.1 69.748,87.376 71.502,89.13 D5.2 80.491,89.13 81.788,87.833 81.788,82.363 R29.2 ; V1.1 74.93,48.514 75.946,47.498 75.946,43.926 C2.2 82.026,42.91 85.217,46.101 C1.1 88.392,49.276 96.041,41.627 U4.1 U4.2 ; v2(120.142,32.766) 123.698,32.766 124.992,34.06 C26.1 129.246,34.06 C27.2 132.066,36.8 U9.3 ; v2(123.428,49.26) C23.2 133.056,49.26 C22.1 134.215,50.419 U8.3
  Bottom Layer w1: P2.1 63.983,87.376 62.687,86.081 62.687,64.567 P1.1 72.39,54.864 V1.1 74.422,46.482 74.422,43.18 68.352,37.11 C30.1 72.416,32.766 v2(120.142,32.766) 123.19,35.814 125.73,35.814 127.254,37.338 127.254,38.862 122.174,43.942 122.174,48.006 v2(123.428,49.26)
VDDIO: C5.1 R14.2 U3.40 | length 44.1
  Top Layer w0.254: R14.2 121.92,88.9 v1(122.352,89.332) ; C5.1 136.821,113.437 U3.40 136.821,108.441 139.319,105.943 v1(139.319,97.587)
  Bottom Layer w0.254: v1(122.352,89.332) 137.49,89.332 139.319,91.161 v1(139.319,97.587)
pads on no net: B1.3 B1.4 P1.4 P2.4 SIM1.8 SIM1.9 SIM1.10 SIM1.12 U1.2 U1.10 U1.11 U1.14 U1.16 U1.17 U1.20 U1.21 U1.22 U1.23 U1.25 U1.26 U1.27 U1.28 U1.34 U1.35 U1.36 U1.37 U1.38 U1.41 U1.44 U1.45 U1.50 U1.51 U1.52 U1.53 U1.54 U1.55 U1.56 U1.57 U1.58 U1.59 U1.61 U1.62 U3.3 U3.4 U3.5 U3.7 U3.9 U3.10 U3.11 U3.12 U3.14 U3.22 U3.23 U3.24 U3.25 U3.26 U3.28 U3.29 U3.32 U3.38 U4.6 U8.4 U9.4

## Polygon pours and split planes (outlines as drawn)
GND on Top Layer "Keep-Out Layer-No Net" (solid, pour order 0): 60,115 149.86,115 149.86,30.62 150,30.48 60,30.48 60,114.802 60.198,115
GND on Bottom Layer "Keep-Out Layer-No Net" (solid, pour order 2): 60,115 149.606,115 149.606,115.062 149.733,115.189 149.922,115 150,115 150,30.874 149.606,30.48 150,30.48 60,30.48 60,114.681

## Keep-outs
Keep-Out Layer:
  lines w0.1: 60,30.48 60,115 150,115 150,30.48 60,30.48

## Silkscreen, mask and mechanical layers (free items; w line width, h text height)
Top Overlay:
  text "no" at 61.214,106.934 h1.2
  text "nc" at 61.214,101.854 h1.2
  text "com" at 61.087,96.901 h1.2
  text "Gnd" at 61.087,91.821 h1.2
  text "vcc" at 61.087,86.995 h1.2
  text "no" at 60.96,81.407 h1.2
  text "nc" at 61.087,76.327 h1.2
  text "com" at 61.087,71.247 h1.2
  text "Gnd" at 60.96,66.167 h1.2
  text "vcc" at 60.96,61.214 h1.2

## Text inside footprints (layer, text, board x,y; h text height)
C1: Top Overlay "-" at 84.917,38.676 h0.8 r270; Top Overlay "+" at 84.817,46.876 h0.8 r270
C3: Top Overlay "-" at 113.619,38.676 h0.8 r270; Top Overlay "+" at 113.519,46.876 h0.8 r270